# Altium PCB ERBB.PcbDoc
Units mil, origin at the board's own origin, x right, y up, seen from the top; angles counter-clockwise.
Board outline 1006 x 1802 mil, 2 copper layers (Top Layer, Bottom Layer), stack 60.8 mil thick; 26 components, 28 nets, 120 pads, 106 vias.
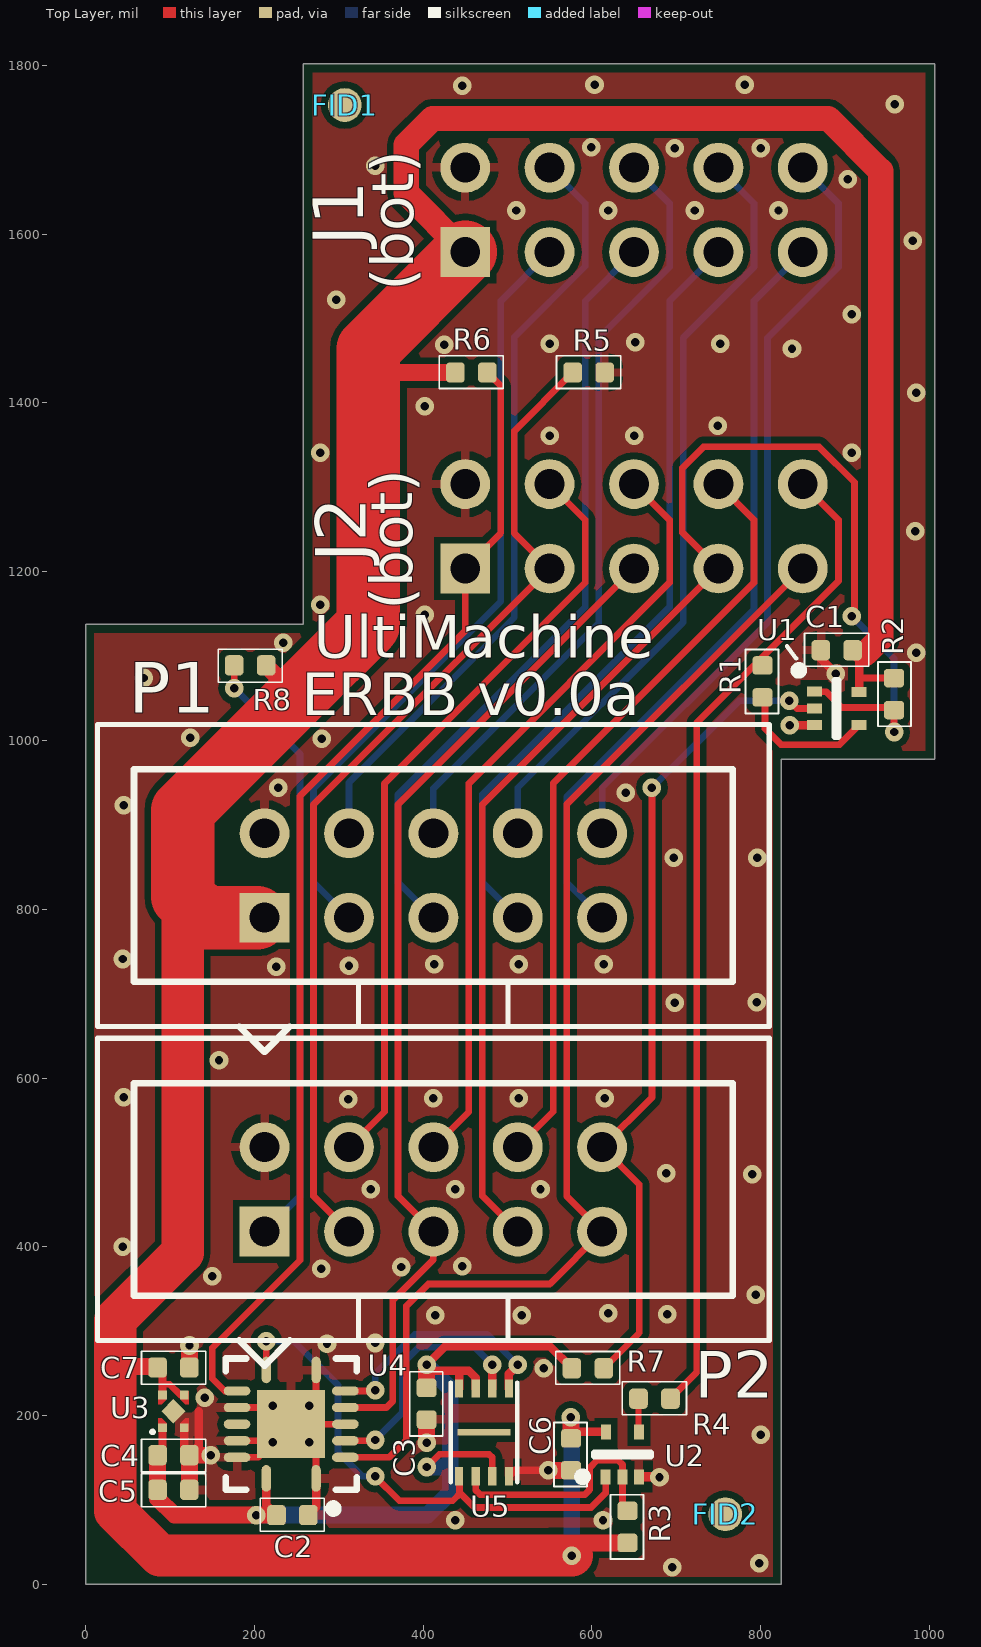
[diagram p0: Top Layer view]
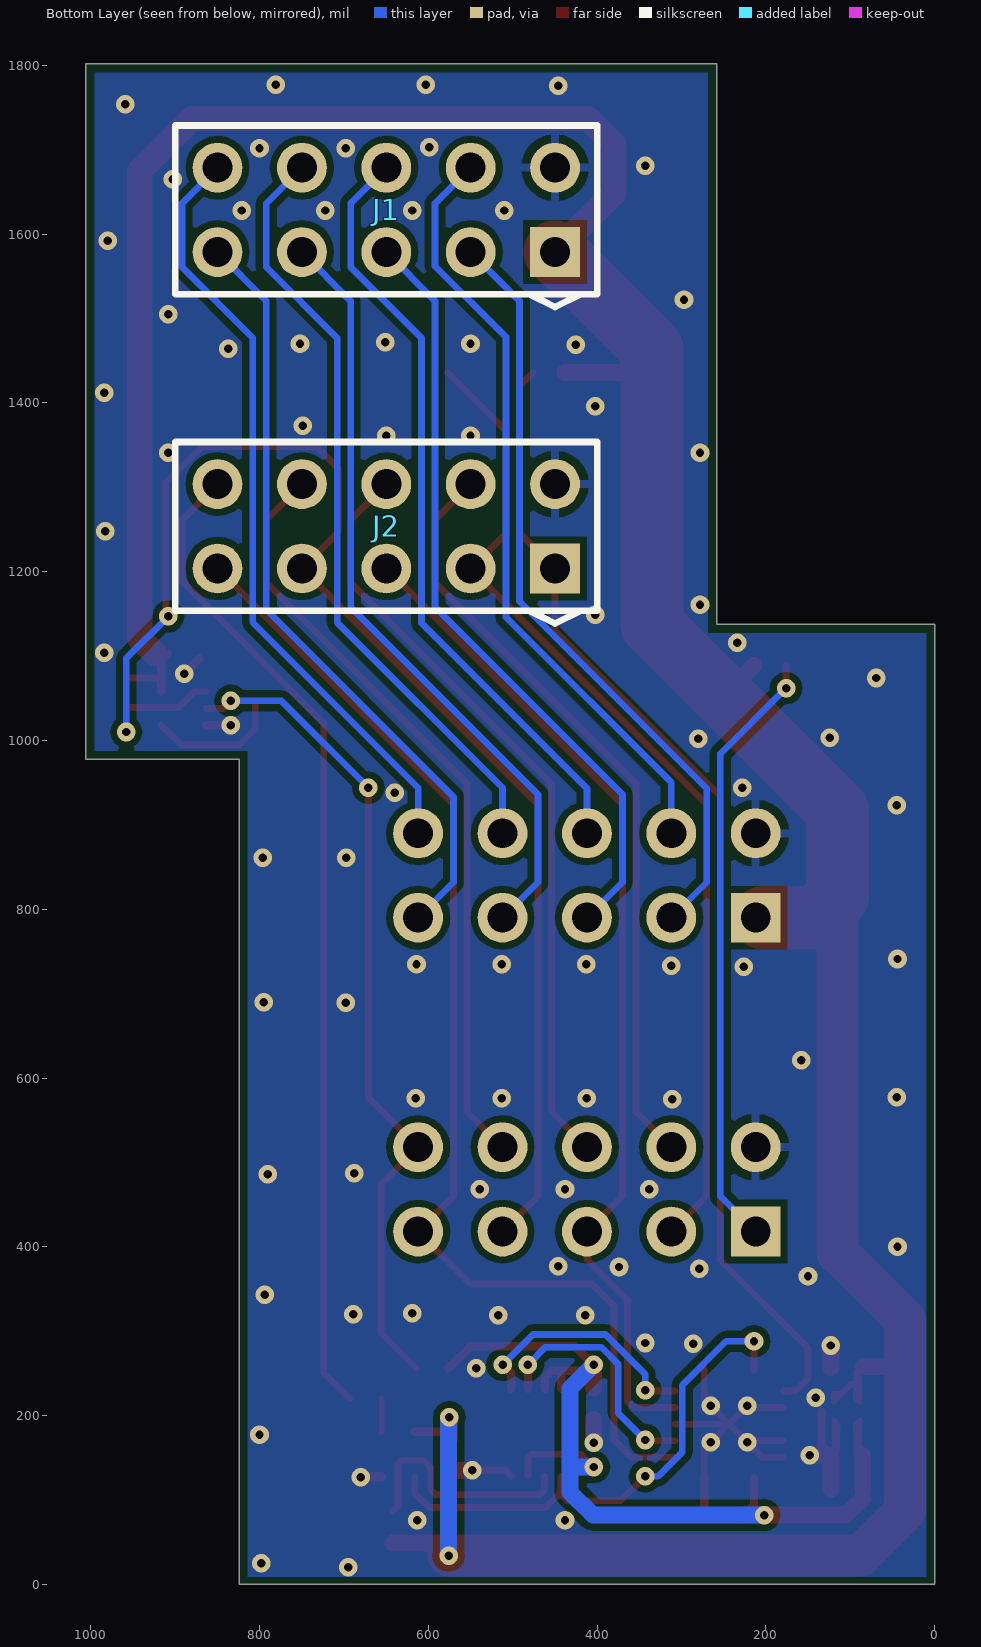
[diagram p1: Bottom Layer view, seen from below]

## Layer stack, top to bottom
Top Solder: solder mask 0.4, Solder Resist, Dk 3.5
Top Layer: signal copper 1.4
Dielectric 1: dielectric 58, FR-4, Dk 4.8
Bottom Layer: signal copper 1.4
Bottom Solder: solder mask 0.4, Solder Resist, Dk 3.5

## Board outline
0,0 0,1138 258,1138 258,1802 1006,1802 1006,978 824,978 824,0

## Design rules (kind name [scope] priority, off if disabled: settings)
AcuteAngle [All] p1: minimum=6.00000000000000E+0001 checktracksonly=FALSE
Clearance fiducial [InComponentClass('Fiducials')] p1: gap=7 ignorepadtopadclearanceinfootprint=FALSE except(0: Arc-Hole Track-Hole SMDPad-Hole THPad-Hole Via-Hole Fill-Hole Poly-Hole Region-Hole Text-Hole; 20: SMDPad-Poly)
Clearance "Polygon Clearance" [InPolygon] p2: gap=8 ignorepadtopadclearanceinfootprint=FALSE except(0: Arc-Hole Track-Hole SMDPad-Hole THPad-Hole Via-Hole Fill-Hole Poly-Hole Region-Hole Text-Hole; 10: Fill-Fill Fill-Poly Fill-Region Poly-Poly Poly-Region Region-Region)
Clearance Clearance_1 [All] p3: gap=5.3 ignorepadtopadclearanceinfootprint=FALSE
ComponentClearance ComponentClearance_Connectors [InComponentClass('Connectors')] p1 off: gap=1 collisioncheckmode=3 verticalgap=10 showdistances=FALSE
ComponentClearance [All] p2 off: gap=10 collisioncheckmode=3 verticalgap=10 showdistances=FALSE
HoleSize [All] p1: absolutevalues=TRUE maxlimit=100000 minlimit=7.87 maxpercent=80.000 minpercent=20.000
HoleToHoleClearance [All] p1: gap=8 allowstackedmicrovias=TRUE
MinimumAnnularRing [All] p1: minimumring=6
MinimumSolderMaskSliver [All] p1: minsoldermaskwidth=4
PasteMaskExpansion [All] p1: expansion=-1
PlaneClearance [All] p1: clearance=12
PlaneConnect PowerPlaneConnect+12V [InNet('+12V')] p1: planeconnectstyle=Relief reliefexpansion=20 reliefentries=4 reliefconductorwidth=24 reliefairgap=10
PlaneConnect PlaneConnect_Via [IsVia] p2: planeconnectstyle=Direct reliefexpansion=20 reliefentries=4 reliefconductorwidth=10 reliefairgap=10
PlaneConnect PowerPlaneConnect [All] p3: planeconnectstyle=Relief reliefexpansion=12 reliefentries=4 reliefconductorwidth=8 reliefairgap=12
PlaneConnect [All] p4: planeconnectstyle=Relief reliefexpansion=20 reliefentries=4 reliefconductorwidth=20 reliefairgap=10
PolygonConnect ThermalVias [IsVia] p1: connectstyle=Direct reliefconductorwidth=10 reliefentries=4 polygonreliefangle="90 Angle" airgapwidth=10
PolygonConnect PolygonConnect_no_connect [InNet('+12V2') and OnLayer('Top')  and InComponent('F2')] p2: connectstyle=NoConnect reliefconductorwidth=24 reliefentries=4 polygonreliefangle="90 Angle" airgapwidth=10
PolygonConnect "Direct Connect" [(IsNamedPolygon('Direct Connect')) OR (IsNamedPolygon('Direct-Connect')) OR InComponent('R13')  Or InComponent('D9') Or InComponent('L1') Or InComponent('C45') Or InComponent('U3') Or InComponent('C35') Or InComponent('R24') Or InComponent('D2') Or InComponent('D7') Or InComponent('D8') Or InComponent('Q1') Or InComponent('Q5') Or InComponent('D6') Or InComponent('D10') Or InComponent('C40')     Or InComponent('D8')  Or InComponent('F5')  Or InComponent('FB1') Or InComponent('FB2')] p3: connectstyle=Direct reliefconductorwidth=10 reliefentries=4 polygonreliefangle="90 Angle" airgapwidth=10
PolygonConnect "PolygonConnect_24 mil" [InNet('NetD6_A') OR  InNet('+12V2') OR InComponent('C54')   OR InNet('VMOT')     OR (IsNamedPolygon('Direct Connect')) Or InNet('12V-IN')] p4: connectstyle=Relief reliefconductorwidth=24 reliefentries=4 polygonreliefangle="90 Angle" airgapwidth=10
PolygonConnect "PolygonConnect_Bot 50mil" [InNet('+12V3') Or InNet('NetF3_1') Or InComponent('X10') Or (IsNamedPolygon('Direct Connect')) vs OnLayer('Bottom')] p5: connectstyle=Relief reliefconductorwidth=50 reliefentries=4 polygonreliefangle="90 Angle" airgapwidth=10
PolygonConnect PolygonConnect_50mil [InNet('Netd10_a')  Or (IsNamedPolygon('Direct Connect'))] p6: connectstyle=Relief reliefconductorwidth=50 reliefentries=4 polygonreliefangle="90 Angle" airgapwidth=10
PolygonConnect "Internal GND" [OnMid] p7: connectstyle=Relief reliefconductorwidth=8 reliefentries=4 polygonreliefangle="90 Angle" airgapwidth=14
PolygonConnect [All] p8: connectstyle=Relief reliefconductorwidth=10 reliefentries=4 polygonreliefangle="90 Angle" airgapwidth=10
RoutingVias [All] p1: holewidth=15 width=30 viastyle="Through Hole" minholewidth=10 minwidth=22 maxholewidth=15 maxwidth=32
SMDToCorner [All] p1: distance=30000
ShortCircuit bot_entry_header [InPadClass('NPTH_bot') vs InPadClass('top_smt_bot')] p1: allowed=TRUE
ShortCircuit [All] p2: allowed=FALSE
SilkToSilkClearance [All] p1 off: silktosilkclearance=10
SilkToSolderMaskClearance [IsPad] p1 off: minsilkscreentomaskgap=10 clearancetoexposedcopper=TRUE
SolderMaskExpansion SolderMaskExpansion_Via [IsVia] p1: expansion=-15
SolderMaskExpansion [All] p2: expansion=2
Width [All] p1: maxlimit=1000 minlimit=7 preferedwidth=8 minimp=50.000000 maximp=50.000000 favimp=50.000000
20 further rules are at their usual default settings.

## Components (designator, comment, footprint, x,y, rotation, side; value= is the part's Value field where it differs from the comment)
C1 "100nF" C0402 890,1107 r180 top
C2 "100nF" C0402 245,82 r180 top
C3 "100nF" C0402 404,214 r270 top
C4 "1uF" C0402 104,153 r0 top
C5 "1uF" C0402 104,112 r0 top
C6 "100nF" C0402 575,154 r270 top
C7 "1uF" C0402 104,257 r0 top
FID1 "FIDUCIAL" FIDUCIAL-1X2 307,1753 r270 top
FID2 "FIDUCIAL" FIDUCIAL-1X2 758,83 r270 top
J1 "HDR10" HDR2X5_PLUG 649.75,1628.75 r0 bottom locked
J2 "HDR10" HDR2X5_PLUG 649.75,1253.75 r0 bottom
P1 "HDR10" "HDR2X5 IDC" 412,840 r0 top locked
P2 "HDR10" "HDR2X5 IDC" 412,468 r0 top locked
R1 "22R" R0402 802,1069.9 r90 top
R2 "10K" R0402 958,1055 r270 top
R3 "10K" R0402 642,68 r90 top
R4 "22R" R0402 674,220 r0 top
R5 "20k" R0402 596,1436 r0 top
R6 "10K" R0402 457,1436 r0 top
R7 "10K" R0402 595,256 r0 top
R8 "10K" R0402 195,1089 r180 top
U1 "74AHCT1G125" SOTFL50P160X60-5L 890,1038 r0 top
U2 "74AHCT1G125" SOTFL50P160X60-5L 636,154 r90 top
U3 "LDO 3.3V 250mA" "XDFN4 1X1" 104,205 r0 top
U4 "SN74LVC125A" PVQFN14_3.5X3.5 243.53,189.8 r90 top
U5 "2Mb" "USON8 2X3" 472,180 r90 top

## Footprints (in the part's own frame and the unit in brackets; to place one, negate y for a bottom-side part, rotate by r counter-clockwise, add the part's x,y. Pads: shape width x height; smd on the part's side, far side on the other; paste and mask are expansions set on the pad)
C0402 [mil]
  rrect40% 22x24 smd: 1(18.85,0) 2(-18.85,0)
  silkscreen extent -38,-20 38,19, body extent -20,-10 20,10, height 20
FIDUCIAL-1X2 [mil]
  rrect100% 40x40 smd paste-3897.64 mask+20: 1(0,0)
  body extent -20,-20 20,20, height 1
"HDR2X5 IDC" [mm] "Connector; Header; 5x2 Position"
  rect 1.5x1.5 hole 0.9: 1(-5.08,-1.27)
  round 1.5 hole 0.9: 2(-5.08,1.27) 3(-2.54,-1.27) 4(-2.54,1.27) 5(0,-1.27) 6(0,1.27) 7(2.54,-1.27) 8(2.54,1.27) 9(5.08,-1.27) 10(5.08,1.27)
  silkscreen extent -10.11,-5.31 10.11,4.55, body extent -10.19,-4.63 10.19,4.63, height 9.1
HDR2X5_PLUG [mm] "Connector; Header; 5x2 Position"
  rect 1.5x1.5 hole 0.9: 1(-5.08,1.27)
  round 1.5 hole 0.9: 2(-5.08,-1.27) 3(-2.54,1.27) 4(-2.54,-1.27) 5(0,1.27) 6(0,-1.27) 7(2.54,1.27) 8(2.54,-1.27) 9(5.08,1.27) 10(5.08,-1.27)
  silkscreen extent -6.35,-2.54 6.35,2.92, body extent -6.45,-2.64 6.45,2.64, height 6.35
PVQFN14_3.5X3.5 [mm] "QFN, 14-Leads, Body 3.50x3.50mm, Pitch 1.50mm/0.50mm, Thermal Pad 2.05x2.05mm, IPC High Density"
  oval 0.8x0.28 smd: 1(-1.631,-0.75) 7(1.631,-0.75) 8(1.631,0.75) 14(-1.631,0.75)
  oval 0.28x0.8 smd: 2(-1,-1.631) 3(-0.5,-1.631) 4(0,-1.631) 5(0.5,-1.631) 6(1,-1.631) 9(1,1.631) 10(0.5,1.631) 11(0,1.631) 12(-0.5,1.631) 13(-1,1.631)
  rect 2.05x2.05 smd paste-1.143: 15(0,0)
  silkscreen extent -2.66,-1.97 1.97,1.97, body extent -1.83,-1.83 1.83,1.83, height 1
R0402 [mil]
  rrect40% 22x24 smd: 1(-18.9,0) 2(19,0)
  silkscreen extent -38,-19 38,20, body extent -20,-10 20,10, height 14
SOTFL50P160X60-5L [mm] "SOTFL, 5-Leads, Body 1.60x1.60mm, Pitch 0.50mm, IPC High Density"
  rect 0.45x0.3 smd: 1(-0.675,0.503) 2(-0.675,0) 3(-0.675,-0.503) 4(0.675,-0.5) 5(0.675,0.5)
  silkscreen extent -1.27,-0.85 0.05,1.27, body extent -0.8,-0.85 0.8,0.85, height 0.6
"USON8 2X3" [mm]
  rect 0.55x0.25 smd paste-0.025 mask+0.051: 1(-1.32,0.75) 2(-1.32,0.25) 3(-1.32,-0.25) 4(-1.32,-0.75) 5(1.32,-0.75) 6(1.32,-0.25) 7(1.32,0.25) 8(1.32,0.75)
  rect 0.2x1.6 smd paste-0.025 mask+0.051: 9(0,0)
  round 0.508 on Top Overlay mask+0.051: ""(-1.86,1.15)
  silkscreen extent -1.5,-1 1.5,1, body extent -1.55,-1.05 1.55,1.05, height 0.6
"XDFN4 1X1" [mm]
  rect 0.26x0.26 smd paste-0.2 mask-0.152: 1(-0.33,-0.49) 2(0.33,-0.49) 3(0.33,0.49) 4(-0.33,0.49)
  rect 0.52x0.52 smd rot 45 mask+0: T(0,0)
  Top Layer region: -0.46,0.21 -0.35,0.21 -0.2,0.36 -0.2,0.6 -0.46,0.6
  Top Layer region: 0.46,-0.21 0.35,-0.21 0.2,-0.36 0.2,-0.6 0.46,-0.6
  Top Layer region: -0.46,-0.21 -0.35,-0.21 -0.2,-0.36 -0.2,-0.6 -0.46,-0.6
  Top Layer region: 0.46,0.21 0.35,0.21 0.2,0.36 0.2,0.6 0.46,0.6
  silkscreen extent -0.68,-0.67 -0.58,-0.57, body extent -0.5,-0.5 0.5,0.5, height 0.43

## Part data
C1 C2 C3 C6: library part "100nF 0402 16V X7R", "CAP CER 0402 100nF 16V 10% X7R", Manufacturer=Murata, MANUFACTURER #=GRM155R71C104KA88D, TOLERANCE=10%, DISTRIBUTOR=Digikey, DISTRIBUTOR #=490-3261-2-ND, EE_SPEC=16V, PART="0.1uF 16V X7R 0402", PART DESCRIPTION="0.10µF ±10% 16V Ceramic Capacitor X7R 0402 (1005 Metric)"
C4 C5 C7: library part "1uF 0402 6.3V X5R", "CAP CER 0402 1uF 6.3V 10% X5R", Manufacturer=Murata, MANUFACTURER #=GRM155R60J105KE19D, TOLERANCE=10%, DISTRIBUTOR=Digikey, DISTRIBUTOR #=490-1320-2-ND, EE_SPEC=6.3V, PART="1uF 6.3V X5R 0402", PART DESCRIPTION="1µF ±10% 6.3V Ceramic Capacitor X5R 0402 (1005 Metric)"
FID1 FID2: "Fiducial"
J1 J2: library part "Header FM 10PIN 2ROW T-HOLE VERT", "CONN FM HEADER VERT 10POS GOLD", Manufacturer=Multicomp, MANUFACTURER #=2214S-10SG-85, TOLERANCE=-NA-, DISTRIBUTOR=Newark, DISTRIBUTOR #=08N6807, EE_SPEC=-NA-, PART=HDR10, PART DESCRIPTION="2.54mm pitch, double row PCB socket"
P1 P2: library part "Header 10PIN 2ROW T-HOLE VERT SHROUDED", "CONN HEADER VERT 10POS GOLD", Manufacturer="On Shore", MANUFACTURER #=302-S101, TOLERANCE=-NA-, DISTRIBUTOR=Digikey, DISTRIBUTOR #=ED1543-ND, EE_SPEC=-NA-, PART=HDR10, PART DESCRIPTION="10 Positions Header Connector 0.100\" (2.54mm) Through Hole Gold"
R1 R4: library part "22R 1% 0402", "RES 0402 22r 62.5mW 1%", Manufacturer=Yageo, MANUFACTURER #=RC0402FR-0722RL, TOLERANCE="+/- 1%", DISTRIBUTOR=Digi-Key, DISTRIBUTOR #=311-22.0LRTR-ND, EE_SPEC="22R 1% 0402", PART=22R, PART DESCRIPTION="22 Ohm ±1% 0.063W, 1/16W Chip Resistor 0402 (1005 Metric) Moisture Resistant Thick Film"
R2 R3 R6 R7 R8: library part "10k 1% 0402", "RES SMD 10K OHM 1% 1/16W 0402", Manufacturer=Yageo, MANUFACTURER #=RC0402FR-0710KP, TOLERANCE=1%, DISTRIBUTOR=Digikey, DISTRIBUTOR #=YAG1249TR-ND, EE_SPEC=1/16W, PART="10k 1% 0402", PART DESCRIPTION="10k Ohm ±1% 0.063W, 1/16W Chip Resistor 0402 (1005 Metric) Moisture Resistant Thick Film"
R5: library part "20k 1% 0402", "RES SMD 20K OHM 1% 1/16W 0402", Manufacturer=Yageo, MANUFACTURER #=RC0402FR-0720KL, TOLERANCE=1%, DISTRIBUTOR=Digikey, DISTRIBUTOR #=311-20.0KLRTR-ND, EE_SPEC=1/16W, PART="RES SMD 20K OHM 1% 1/16W 0402", PART DESCRIPTION="20k Ohm ±1% 0.063W, 1/16W Chip Resistor 0402 (1005 Metric) Moisture Resistant Thick Film"
U1 U2: library part SN74AHCT1G125DRLR, "IC BUS BUFF TRI-ST N-INV  SOT-553", Manufacturer=TI, TOLERANCE=-NA-, DISTRIBUTOR=Digikey, DISTRIBUTOR #=296-19379-2-ND, EE_SPEC=4.5-5.5V, MANUFACTURER #=SN74AHCT1G125DRLR, PART=SN74AHCT1G125DRLR, PART DESCRIPTION="Buffer, Non-Inverting 1 Element 1 Bit per Element Push-Pull Output SOT-5"
U3: "IC REG LINEAR 3.3V 250MA 4XDFN", Manufacturer="On Semi", MANUFACTURER #=NCP160AMX330TBG, TOLERANCE=-NA-, DISTRIBUTOR=Digikey, DISTRIBUTOR #=NCP160AMX330TBGOSTR-ND, EE_SPEC=250mA, PART="IC REG LINEAR 3.3V 250MA 4XDFN", PART DESCRIPTION="Linear Voltage Regulator IC Positive Fixed 1 Output 3.3V 250mA 4-XDFN (1x1)"
U4: "IC BUS BUFF TRI-ST QD 14VQFN", Manufacturer=TI, MANUFACTURER #=SN74LVC125ARGYR, TOLERANCE=-NA-, DISTRIBUTOR=Digikey, DISTRIBUTOR #=296-13961-2-ND, EE_SPEC="1.65-3.6Vcc, 5V tolerant inputs", PART="IC BUS BUFF TRI-ST QD 14VQFN", PART DESCRIPTION="Buffer, Non-Inverting 4 Element 1 Bit per Element Push-Pull Output 14-VQFN (3.5x3.5)"
U5: library part W25X20CL, "IC FLASH 2MBIT 104MHZ 8USON", Manufacturer=Winbond, MANUFACTURER #="W25X20CLUXIG TR", TOLERANCE=-NA-, DISTRIBUTOR=Digikey, DISTRIBUTOR #=W25X20CLUXIGTR-ND, EE_SPEC=3.3V, PART="IC FLASH 2MBIT 104MHZ 8USON", PART DESCRIPTION="FLASH Memory IC 2Mb (256K x 8) SPI 104MHz 8-USON (2x3)"

## Free pads (board coordinates)
  rect 60x60 on Mech16: ""(449.75,1203.75) ""(449.75,1578.75)
  round 60 on Mech16: ""(449.75,1303.75) ""(449.75,1678.75) ""(849.75,1203.75) ""(849.75,1303.75) ""(849.75,1578.75) ""(849.75,1678.75)

## Via types
v1: diameter 22, hole 10, Top Layer to Bottom Layer, 106 vias

## Nets (pads, with @x,y where several pads share a name; then routed paths per layer and width w, separated by ;. In a path a pad name is that pad's centre, name@x,y a point inside that pad or via, vN(x,y) a via of type N, cw(c..) or ccw(c..) an arc to the next point about the centre after c; other vN are vias at no path point)
3V3: C2.1 C3.2 C4.2 C5.2 R7.1 U3.1 U4.14 U5.3 U5.7 U5.8 | length 1126.3
  Top Layer w8: v1(404,139) 419,154 478,154 481.84,150.16 U5.3
  Top Layer w10: U3.1 91.01,153.14 C4.2@91.15,153 ; U4.14 214,94.15 C2.1 ; U5.8 442.47,253 ; U5.7 462.16,245 454.16,253 442.47,253 ; R7.1 550.1,282 426,282 v1(404,260) 404,253 442.47,253
  Top Layer w20: C5.2@85.15,101.85 105,82 v1(202,82) C2.1 ; C5.2 C4.2 ; C3.2 v1@404,253
  Bottom Layer w20: v1(202,82) 405,82 432,109 432,138 ; v1(404,139) 431,139 432,138 ; v1(404,260) 432,232 432,138
5V0: C1.2 C6.2 C7.2 J1.1 P1.1 R2.1 R3.1 R6.1 R8.1 U1.5 U2.5 U3.3 U3.4 | length 4384.6
  Top Layer w8: 91.01,237 99.63,237 112.34,224.29 U3.3 ; C6.2 C6.2@582.72,180.57 ; 916.57,1073 917.47,1073.9 R2.1
  Top Layer w10: C7.2 91.01,251.14 91.01,237 U3.4 ; C6.2@582.72,180.57 U2.5 ; C1.2@908.85,1103 916.57,1095.28 916.57,1073 U1.5
  Top Layer w20: 37,258 C7.2@85.15,258 ; R8.1 246.4,1056.5 254.5,1056.5 ; 335,1404 367,1436 R6.1 ; 534,34 549.1,49.1 R3.1 ; C6.2 v1(575,198)
  Top Layer w30: J1.1 380,1648.5 380,1706 411,1737 880,1737 942,1675 942,1121 924,1103
  Top Layer w50: 115,815 115,393 35,313 35,87 88,34 534,34 v1(576,34)
  Top Layer w75: P1.1@203,790 140,790 115,815 115,917 254.5,1056.5 335,1137 335,1404 335,1464 J1.1
  Bottom Layer w20: v1(575,198) 576,197 v1(576,34)
GND: C1.1 C2.2 C3.1 C4.1 C5.1 C6.1 C7.1 J1.2 J2.2 P1.2 P2.2 R5.2 U1.3 U2.3 U3.2 U3.T U4.1 U4.4 U4.7 U4.10 U4.12 U4.13 U4.15 U5.4 | length 827.7
  Top Layer w8: U4.13 204.16,150.43 U4.15 ; U4.12 U4.15@221.87,170.11 ; U4.10 223.84,209.48 U4.15 ; U4.1 273.06,160.27 v1(265.18,168.15) U4.15 ; U4.7 273.06,219.33 U4.15 ; U4.4 U4.15 ; 404,181 405,180
  Top Layer w9: U5.4 508.5,135 v1(548,135)
  Top Layer w10: U3.2 116.99,158.86 C4.1 134,164.15 134,205 ; C2.2 273.06,91.21 U4.1 ; v1(834.18,1018.18) U1.3 ; C1.1@871.15,1096.85 v1(889,1079)
  Top Layer w11: U2.3 679.57,127.43 v1(680,127)
  Top Layer w20: C5.1 C4.1 v1(148,153) ; C7.1 122.85,282.85 v1(123,283) ; v1(404,168) 404,181 C3.1 ; v1(548,135) 574.85,135 C6.1
  other v1: 695,20 798,25 438,76 613,76 221.87,168.15 800,177 221.87,211.45 265.18,211.45 141,221 543,256 286,285 343,286 414,319 517,319 689,320 619,321 794,343 150,365 279,374 374,376 446,377 44,400 338,468 438,468 539,468 790,486 688,487 311,575 412,576 513,576 615,576 45,577 158,621 698,689 795,690 226,732 312,733 413,735 513,735 614,735 44,741 697,861 796,861 45,923 640,938 228,944 280,1002 124,1003 69,1074 984,1104 234,1116 402,1149 278,1161 983,1248 278,1341 908,1341 550,1361 650,1361 749,1373 402,1396 984,1412 837,1464 425,1469 550,1470 752,1470 651,1472 908,1505 297,1522 980,1592 510,1628 619,1628 722,1628 821,1628 903,1665 343,1681 698,1702 800,1702 599,1703 959,1754 446,1776 603,1777 781,1777
MISO_3V3: P2.10 R7.2 U1.2 | length 986.9
  Top Layer w8: R7.2 656,298 656,474 P2.10 671,577 v1(671,944) ; v1(834,1047) 843,1038 U1.2
  Bottom Layer w8: v1(671,944) 774,1047 v1(834,1047)
MISO_5V0: J2.10 R1.2 R4.2 | length 1183.7
  Top Layer w8: R4.2 724,251 724,1020.9 892,1188.9 892,1261.5 J2.10
MOSI: J2.5 P2.5 U4.5 | length 1199.3
  Top Layer w8: U4.5 356.48,209.48 364,217 364,337 412,385 P2.5 370,460 370,924 J2.5
NetP2_1: P2.1 R8.2 | length 720.7
  Top Layer w8: v1(176,1062) R8.2
  Bottom Layer w8: v1(176,1062) 254,984 254,460 P2.1
NetR1_1: R1.1 U1.4 | length 157.1
  Top Layer w8: R1.1@805,1042 805,1014 824,995 893.26,995 U1.4
NetR3_2: R3.2 U2.2 U5.2 | length 284.2
  Top Layer w8: U5.2 462.16,111.84 468,106 591,106 597,112 597,138 606,147 631,147 636,142 U2.2 636,93 R3.2
NetR4_1: R4.1 U2.4 | length 39.7
  Top Layer w7: R4.1 655.1,181.16 U2.4
NetU2_1: U2.1 U4.8 U5.1 | length 618.5
  Top Layer w8: U4.8 v1(214,288) ; v1(343,128) 372,99 435,99 444,108 ; U5.1 443,127.5 443,109 461,91 599,91 616.18,108.18 U2.1
  Bottom Layer w8: v1(214,288) 247,288 299,236 299,157 328,128 v1(343,128)
NetU4_3: U4.3 U5.6 | length 291.1
  Top Layer w8: U4.3 342.11,170.11 v1(343,171)
  Top Layer w10: U5.6 481.84,260 v1(482,260)
  Bottom Layer w8: v1(343,171) 375,203 375,261 395,281 461,281 v1(482,260)
NetU4_6: U4.6 U5.5 | length 290.4
  Top Layer w8: U4.6 342.17,229.17 v1(343,230)
  Top Layer w10: U5.5 501.53,249.53 v1(512,260)
  Bottom Layer w8: v1(343,230) 343,249 390,296 476,296 v1(512,260)
nRESET: J2.3 P2.3 R5.1 | length 1197.2
  Top Layer w8: P2.3 270,460 270,924 J2.3 508,1245.5 508,1366.9 R5.1
PC5: J2.1 R6.2 U4.9 | length 1375.8
  Top Layer w8: U4.9 164.83,229.17 150,244 150,280 254,384 254,934 449.75,1129.75 J2.1 492,1246 492,1420 R6.2
PD5: J1.7 P1.7 | length 922
  Bottom Layer w8: P1.7 470,832 470,936 692,1158 692,1521 J1.7
PF5: J1.6 P1.6 | length 922.2
  Bottom Layer w8: P1.6 412,943 608,1139 608,1477 692,1561 692,1636.5 J1.6
PF7: J1.8 P1.8 | length 922.2
  Bottom Layer w8: P1.8 512,944 708,1140 708,1477 792,1561 792,1636.5 J1.8
PG3: J1.3 P1.3 | length 922
  Bottom Layer w8: P1.3 270,832 270,943 492,1165 492,1521 J1.3
PG4: J1.5 P1.5 | length 922
  Bottom Layer w8: P1.5 370,832 370,936 592,1158 592,1521 J1.5
PH2: J1.10 P1.10 | length 922.2
  Bottom Layer w8: P1.10 612,944 808,1140 808,1477 892,1561 892,1636.5 J1.10
PH6: J1.9 P1.9 | length 922
  Bottom Layer w8: P1.9 570,832 570,933 792,1155 792,1521 J1.9
PH7: J1.4 P1.4 | length 922.2
  Bottom Layer w8: P1.4 312,950 508,1146 508,1478 592,1562 592,1636.5 J1.4
PJ2: J2.8 P2.8 | length 919.2
  Top Layer w8: P2.8 554,560 554,949 792,1187 792,1261.5 J2.8
RX3: J2.4 P2.4 | length 919.2
  Top Layer w8: P2.4 354,560 354,949 592,1187 592,1261.5 J2.4
SCK: J2.9 P2.9 U4.2 | length 1427.3
  Top Layer w8: U4.2 359.43,150.43 380,171 380,330 406,356 550,356 P2.9 570,460 570,924 J2.9
SD_nSS: J2.7 P2.7 R2.2 U1.1 | length 1735.3
  Top Layer w8: P2.7 470,460 470,924 J2.7 707,1246.5 707,1323 732,1348 869,1348 911,1306 911,1150 v1(908,1147) ; U1.1 877.18,1057.82 896,1039 955,1039 R2.2 v1(958,1010)
  Bottom Layer w8: v1(908,1147) 958,1097 v1(958,1010)
TX3: J2.6 P2.6 | length 919.2
  Top Layer w8: P2.6 454,560 454,949 692,1187 692,1261.5 J2.6
pads on no net: FID1.1 FID2.1 U4.11 U5. U5.9

## Polygon pours and split planes (outlines as drawn)
GND on Bottom Layer "BOT GND" (solid, remove dead copper, pour order 2): 10,9 814,9 814,988 995,988 995,1791 269,1791 269,1127 10,1127
GND on Top Layer "TOP GND" (solid, remove dead copper, pour order 0): 10,9 814,9 814,988 995,988 995,1791 269,1791 269,1127 10,1127

## Silkscreen, mask and mechanical layers (free items; w line width, h text height)
Top Overlay:
  lines w5: 831,1112 842,1097
  text "(bot)" at 388,1533 h50 r90
  text "(bot)" at 387,1155 h50 r90
  text "UltiMachine" at 270,1098 h50
  text "ERBB v0.0a" at 256,1030 h50
Outline:
  the board outline again, w5
Scratch:
  lines w4: -34.25,300.75 173.75,300.75 584.75,300.75 ; -34.25,331.75 173.75,331.75 584.75,331.75 ; 1.1,777.71 412.1,777.71 620.1,777.71 ; 1.1,808.71 412.1,808.71 620.1,808.71 ; 38.58,262.54 38.58,673.54 38.58,881.54 ; 69.58,262.54 69.58,673.54 69.58,881.54 ; 100.58,262.54 100.58,673.54 100.58,881.54 ; 173.75,362.75 584.75,362.75 ; 484.54,227.18 484.54,435.18 484.54,846.18 ; 515.54,227.18 515.54,435.18 515.54,846.18 ; 546.54,227.18 546.54,435.18 546.54,846.18
  lines w5: -503,1490 -503,1144 193,1144 193,1490 -502,1490 ; 113,195 140,195 ; 256,22 256,55 ; -308,1504 192,1504 192,1730 80,1730 80,1767 -196,1767 -196,1730 -308,1730 -308,1504 ; 252,1075 1048,1075 1048,1433 252,1433 252,1075 ; 252,1449 1048,1449 1048,1808 252,1808 252,1449 ; 876,46 914,46 914,34 1140,34 1140,957 914,957 914,944 876,944 876,668 914,668 914,633 876,633 876,357 914,357 914,322 876,322 876,46